# Altium PCB FPv0.12.PcbDoc (part 2 of 2)
Units mm, origin at the board's own origin, x right, y up, seen from the top; angles counter-clockwise.
Board outline 81.28 x 53.34 mm, 4 copper layers (Top Layer, GROUND PLANE, MidLayer1, Bottom Layer); 94 components, 141 nets, 574 pads, 258 vias.
Unrouted connection lines stored in the file: 31.
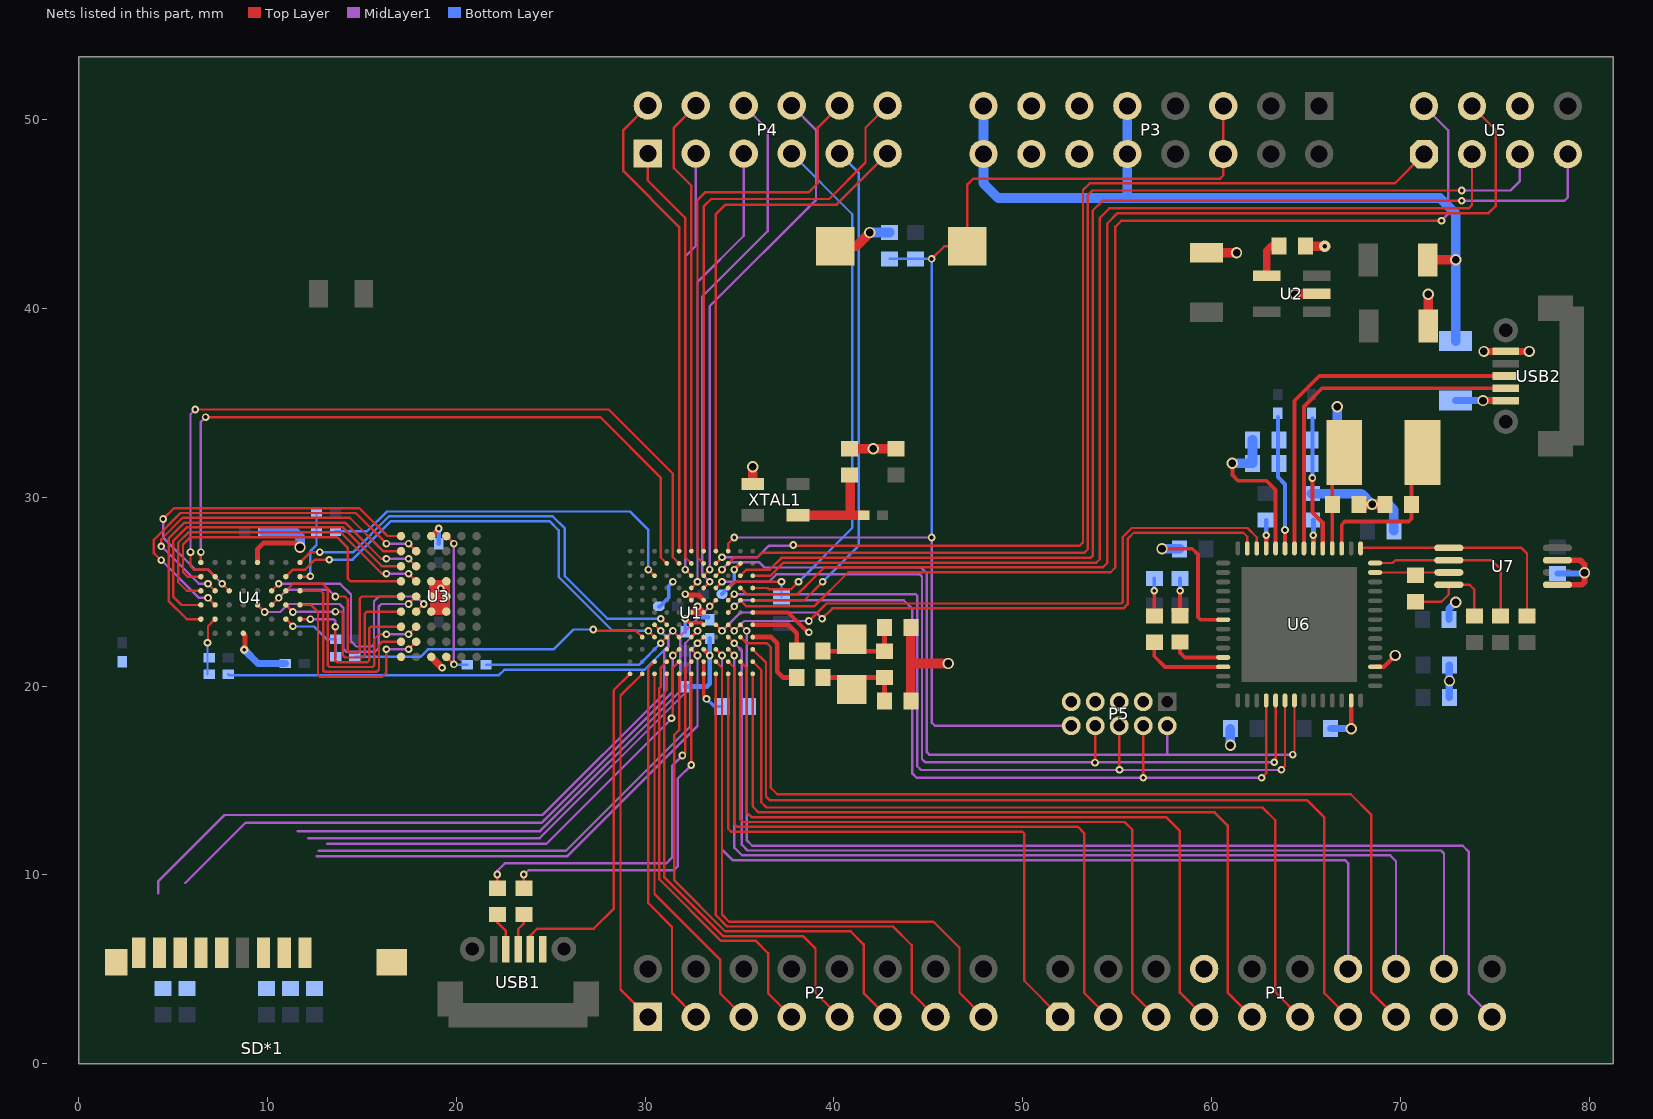
[diagram p4: the nets of this part, all layers, seen from the top]

## Via types
v1: diameter 0.403, hole 0.2, Top Layer to Bottom Layer, tented both sides, 200 vias
v2: diameter 0.6, hole 0.4, Top Layer to Bottom Layer, tented both sides, 29 vias
v3: diameter 0.5, hole 0.2, Top Layer to Bottom Layer, 25 vias
v4: diameter 1, hole 1, Top Layer to Bottom Layer, 2 vias
v5: diameter 0.6, hole 0.24, Top Layer to Bottom Layer, tented both sides, 1 vias
v6: diameter 0.453, hole 0.2, Top Layer to Bottom Layer, tented both sides, 1 vias

## Nets (pads, with @x,y where several pads share a name; then routed paths per layer and width w, separated by ;. In a path a pad name is that pad's centre, name@x,y a point inside that pad or via, vN(x,y) a via of type N, cw(c..) or ccw(c..) an arc to the next point about the centre after c; other vN are vias at no path point) (continued)
AD19: U1.D10 U4.H1 | length 38
  Top Layer w0.127: U4.H1@6.475,26.55 v1(6.475,27.1) ; v1(6.725,34.25) 27.625,34.25 30.825,31.05 30.825,26.825 U1.D10@31.15,26.5
  MidLayer1 w0.127: v1(6.475,27.1) 6.475,34 v1(6.725,34.25) v1@6.85,34.25
AD20: U1.E10 U4.G2 | length 41.5
  Top Layer w0.127: v1@5.925,27.125 v1(5.925,27.1) 5.925,26.35 6.1,26.175 6.85,26.175 U4.G2@7.225,25.8 ; v1(6.175,34.65) 28.075,34.65 31.464,31.261 31.464,27.284 31.466,27.282 31.466,26.834 U1.E10@31.8,26.5
  MidLayer1 w0.127: v1(5.925,27.1) 5.925,34.4 v1(6.175,34.65)
ADC0_DM0: P1.7 U1.K2 | length 41.8
  Top Layer w0.127: U1.K2@35.05,21.3 35.375,20.975 35.375,13.325 35.638,13.062 57.588,13.062 58.325,12.325 58.325,3.769 P1.7@59.609,2.485
ADC0_DM1: P2.15 U1.H2 | length 31
  Top Layer w0.127: U1.H2@33.75,21.3 34.075,20.975 34.075,7.9 34.45,7.525 45.275,7.525 46.65,6.15 46.65,3.76 P2.15@47.925,2.485
ADC0_DP0: P1.5 U1.K1 | length 39.1
  Top Layer w0.127: U1.K1@35.05,20.65 35.05,12.95 35.192,12.808 55.392,12.808 55.8,12.4 55.8,3.754 P1.5@57.069,2.485
ADC0_DP1: P2.13 U1.H1 | length 28.1
  Top Layer w0.127: U1.H1@33.75,20.65 33.75,7.866 34.345,7.271 43.129,7.271 44.125,6.275 44.125,3.745 P2.13@45.385,2.485
ADC0XX: P1.14 U1.H3 | length 49.8
  Top Layer w0.127: U1.H3@33.75,21.95 v1(34.075,21.625)
  MidLayer1 w0.127: v1(34.075,21.625) 34.075,11.35 34.637,10.788 67.062,10.788 67.229,10.621 P1.14@67.229,5.025
ADC1_DM0: P1.11 U1.L2 | length 46.2
  Top Layer w0.127: U1.L2@35.7,21.3 36.15,20.85 36.15,13.85 36.425,13.575 62.7,13.575 63.375,12.9 63.375,3.799 P1.11@64.689,2.485
ADC1_DM1: P1.3 U1.J2 | length 37.7
  Top Layer w0.127: U1.J2@34.4,21.3 34.725,20.975 34.725,12.7 34.871,12.554 52.921,12.554 53.25,12.225 53.25,3.764 P1.3@54.529,2.485
ADC1_DP0: P1.9 U1.L1 | length 43.3
  Top Layer w0.127: U1.L1@35.7,20.65 35.7,13.625 36.009,13.316 60.159,13.316 60.85,12.625 60.85,3.784 P1.9@62.149,2.485
ADC1_DP1: P1.1 U1.J1 | length 34.5
  Top Layer w0.127: U1.J1@34.4,20.65 34.4,12.45 34.55,12.3 49.975,12.3 50.079,12.196 50.079,4.395 P1.1@51.989,2.485
ADC1XX: P1.16 U1.J3 | length 51.7
  Top Layer w0.127: U1.J3@34.4,21.95 v1(34.725,21.625)
  MidLayer1 w0.127: v1(34.725,21.625) 34.725,11.45 35.133,11.042 69.458,11.042 69.769,10.731 P1.16@69.769,5.025
ADDR0: U3.J1
ADDR1: U3.H1 U4.A3 | length 11
  Top Layer w0.127: U4.A3@11.725,25.05 12.825,25.05 12.946,24.929 12.946,20.829 13.017,20.758 15.783,20.758 15.908,20.883 15.908,22.183 16.075,22.35 U3.H1@17.075,22.35
ADDR2: U3.H2 U4.A4 | length 11.2
  Top Layer w0.127: U4.A4@11.725,24.3 12.3,24.3 12.675,23.925 12.675,20.6 12.771,20.504 16.079,20.504 16.3,20.725 v1(16.3,21.95) ; v1(17.475,21.95) U3.H2@17.875,22.35
  MidLayer1 w0.127: v1(16.3,21.95) v1(17.475,21.95)
ADDR3: U3.G1 U4.A5 | length 9.3
  Top Layer w0.127: U4.A5@11.725,23.55 v1(12.275,23.55) ; v1(13.6,23.15) 13.6,21.35 13.684,21.266 15.291,21.266 15.4,21.375 15.4,22.59 15.4,23.075 15.475,23.15 U3.G1@17.075,23.15
  MidLayer1 w0.127: v1(12.275,23.55) 13.5,23.55 13.6,23.45 v1(13.6,23.15)
ADDR4: U3.G2 U4.B3 | length 13
  Top Layer w0.127: U4.B3@10.975,25.05 11.35,25.425 12.925,25.425 13.2,25.15 13.2,21.1 13.288,21.012 15.566,21.012 15.654,21.1 15.654,22.484 15.92,22.75 v1(16.3,22.75) v1@16.292,22.758 ; v1(17.475,22.75) U3.G2@17.875,23.15
  MidLayer1 w0.127: v1(16.3,22.75) v1(17.475,22.75)
ADDR5: U3.F1 U4.B4 | length 11.1
  Top Layer w0.127: U4.B4@10.975,24.3 v1(11.35,23.925) ; v1(13.6,23.95) 13.925,23.95 13.996,23.879 13.996,21.629 14.105,21.52 15.066,21.52 15.146,21.6 15.146,23.184 15.15,23.188 15.15,23.825 15.275,23.95 U3.F1@17.075,23.95
  MidLayer1 w0.127: v1(11.35,23.925) 11.375,23.95 v1@13.775,23.95
ADDR6: U3.F2 U4.C3 | length 14.2
  Top Layer w0.127: U4.C3@10.225,25.05 v1(10.6,25.425) ; U3.F2@17.875,23.95 v1(18.275,24.35)
  MidLayer1 w0.127: v1(10.6,25.425) 13.85,25.425 14.425,24.85 14.425,22.375 14.7,22.1 15.521,22.1 15.646,22.225 15.646,24.496 15.9,24.75 17.875,24.75 v1(18.275,24.35)
ADDR7: U3.E1 U4.C4 | length 13
  Top Layer w0.127: U4.C4@10.225,24.3 v1(10.6,24.675) ; v1(13.6,24.75) 14.1,24.75 14.25,24.6 14.25,21.85 14.326,21.774 14.816,21.774 14.892,21.85 14.892,24.642 15,24.75 U3.E1@17.075,24.75
  MidLayer1 w0.127: v1(10.6,24.675) 11.025,25.1 13.25,25.1 v1(13.6,24.75)
ADDR8: U3.E2 U4.D4 | length 13.6
  Top Layer w0.127: U4.D4@9.475,24.3 v1(9.85,23.925) ; v1(17.475,24.35) U3.E2@17.875,24.75
  MidLayer1 w0.127: v1(9.85,23.925) 10.675,23.925 11.1,24.35 13.825,24.35 14.029,24.146 14.029,23.841 14.025,23.837 14.025,21.975 14.188,21.812 15.687,21.812 15.9,22.025 15.9,24.225 16.025,24.35 v1(17.475,24.35)
ADDR9: U3.D1 U4.H2 | length 16.1
  Top Layer w0.127: U4.H2@6.475,25.8 5.775,25.8 5.529,26.046 5.529,27.499 5.923,27.892 13.683,27.892 14.263,27.313 14.263,25.687 14.4,25.55 U3.D1@17.075,25.55
ADDR10: U3.D2 U4.H3 | length 17.4
  Top Layer w0.127: U4.H3@6.475,25.05 5.725,25.05 5.275,25.5 5.275,27.604 5.818,28.146 13.879,28.146 16.075,25.95 v1(16.3,25.95) ; v1(17.475,25.95) U3.D2@17.875,25.55
  MidLayer1 w0.127: v1(16.3,25.95) v1(17.475,25.95)
ADDR11: U3.C1 U4.H4 | length 17.8
  Top Layer w0.127: U4.H4@6.475,24.3 5.45,24.3 5.021,24.729 5.021,27.709 5.72,28.408 14.006,28.408 16.064,26.35 U3.C1@17.075,26.35
ADDR12: U3.C2 U4.H5 | length 19.8
  Top Layer w0.127: U4.H5@6.475,23.55 5.725,23.55 4.767,24.508 4.767,27.814 5.615,28.662 14.113,28.662 16.025,26.75 v1(16.3,26.75) ; v1(17.475,26.75) U3.C2@17.875,26.35
  MidLayer1 w0.127: v1(16.3,26.75) v1(17.475,26.75)
ADDR13: U3.B1 U4.G3 | length 18.1
  Top Layer w0.127: v1(4.375,27.4) 4.375,27.782 5.509,28.916 14.359,28.916 16.125,27.15 U3.B1@17.075,27.15 ; v1(6.85,25.425) U4.G3@7.225,25.05
  MidLayer1 w0.127: v1@4.409,27.384 6.367,25.425 v1(6.85,25.425)
ADDR14: U3.B2 U4.G4 | length 20.4
  Top Layer w0.127: v1(4.375,26.675) 4.352,26.675 3.983,27.044 3.983,27.749 5.404,29.17 14.68,29.17 v1(16.3,27.55) ; v1(6.85,24.675) U4.G4@7.225,24.3 ; v1(17.475,27.55) U3.B2@17.875,27.15
  MidLayer1 w0.127: v1@4.352,26.675 v1(4.375,26.675) 6.375,24.675 v1(6.85,24.675) ; v1(16.3,27.55) v1(17.475,27.55)
ADDR15: U3.A1 U4.F3 | length 19.1
  Top Layer w0.127: v1(4.475,28.85) 5.049,29.424 14.876,29.424 16.35,27.95 U3.A1@17.075,27.95 ; v1(7.6,25.425) U4.F3@7.975,25.05
  MidLayer1 w0.127: v1(4.475,28.85) 4.475,27.875 6.175,26.175 6.85,26.175 v1(7.6,25.425)
AGND: R10.2 U1.F6 U1.G6 | length 3
  Top Layer w0.254: 32.775,23.9 v1(32.775,24.225) ; v1(32.775,24.225) U1.G6@33.1,23.9 U1.F6@32.45,23.9 v1(32.775,24.225)
  Bottom Layer w0.254: v1(32.775,24.225) 32.775,23.8 32.929,23.646 R10.2@33.347,23.646
ALE: R17.2 U3.A4 U3.J4 | length 8.2
  Top Layer w0.127: U3.J4@19.475,21.55 v1(19.875,21.15) ; U3.A4@19.475,27.95 v1(19.875,27.55)
  MidLayer1 w0.127: v1(19.875,21.15) v1(19.875,27.55)
  Bottom Layer w0.127: v1@19.9,21.125 R17.2@20.575,21.125
AVDD: FB1.2 U1.F5 U1.G5 | length 2.4
  Top Layer w0.203: U1.G5@33.1,23.25 32.995,23.355 32.555,23.355 ; 32.345,23.355 U1.F5@32.45,23.25 32.555,23.355 ; 32.345,23.355 v1(32.125,23.575) 32.345,23.355 ; 32.345,23.355 32.555,23.355
  Bottom Layer w0.203: FB1.2@32.125,22.875 v1(32.125,23.575)
BE23_16: U1.D5 U4.A1 | length 24.3
  Top Layer w0.127: U4.A1@11.725,26.55 12.275,27.1 v1(12.775,27.1) ; v1(30.825,23.575) U1.D5@31.15,23.25
  Bottom Layer w0.127: v1(12.775,27.1) 14.55,27.1 16.446,28.996 25.104,28.996 25.75,28.35 25.75,25.82 27.996,23.575 v1(30.825,23.575)
BE31_24: U1.C4 U4.B2 | length 24.7
  Top Layer w0.127: U4.B2@10.975,25.8 11.35,26.175 12,26.175 12.525,26.7 v1(13.275,26.7) ; v1(30.175,22.925) U1.C4@30.5,22.6
  Bottom Layer w0.127: v1(13.275,26.7) 14.509,26.7 16.551,28.742 24.933,28.742 25.417,28.258 25.417,25.794 28.286,22.925 v1(30.175,22.925)
DAC0: P1.19 U1.K5 | length 59.3
  Top Layer w0.127: U1.K5@35.05,23.25 v1(35.375,22.925)
  MidLayer1 w0.127: v1(35.375,22.925) 35.379,22.921 35.379,11.846 35.675,11.55 73.3,11.55 73.625,11.225 73.625,3.709 P1.19@74.849,2.485
DAC1: P1.15 U1.K4 | length 52.9
  Top Layer w0.127: U1.K4@35.05,22.6 35.368,22.283 36.442,22.283 36.658,22.067 36.658,14.617 37,14.275 67.375,14.275 68.45,13.2 68.45,3.804 P1.15@69.769,2.485
EECLK: R23.2 U6.56 U7.2 | length 9.4
  Top Layer w0.127: U6.56@68.666,26.521 69.591,26.521 69.741,26.671 U7.2@72.566,26.671 74.841,26.671 75.309,26.203 R23.2@75.309,23.717
EECS: R24.2 U6.1 U7.1 | length 12.2
  Top Layer w0.127: U6.1@67.916,27.321 U7.1@72.566,27.321 76.416,27.321 76.706,27.031 R24.2@76.706,23.717
EEDATA: R25.1 U6.55 U7.3 | length 3.9
  Top Layer w0.127: U6.55@68.666,26.021 U7.3@72.566,26.021
FB_ALE: R17.1 U1.D4 | length 10.2
  Top Layer w0.127: v1(30.825,22.275) U1.D4@31.15,22.6
  Bottom Layer w0.127: R17.1@21.575,21.125 29.675,21.125 v1(30.825,22.275)
FB_CS0: U1.D3
FB_CS2: R13.2 U1.B4 | length 16
  Top Layer w0.127: v1(27.25,23) 27.325,22.925 29.525,22.925 U1.B4@29.85,22.6
  Bottom Layer w0.127: R13.2@14.625,21.55 18.1,21.55 18.5,21.95 25.15,21.95 26.2,23 v1(27.25,23)
FB_OE: R11.2 U1.C9 | length 20
  Top Layer w0.127: v1(30.175,26.175) U1.C9@30.5,25.85
  Bottom Layer w0.127: R11.2@13.6,28.2 15.275,28.2 16.325,29.25 29.2,29.25 30.175,28.275 v1(30.175,26.175)
FB_RW: R12.2 U1.C5 | length 25.4
  Top Layer w0.127: U1.C5@30.5,23.25 v1(30.825,22.925)
  Bottom Layer w0.127: R12.2@7.925,20.625 7.967,20.583 22.258,20.583 22.546,20.871 29.975,20.871 31.225,22.121 31.225,22.525 v1(30.825,22.925)
FT_RXD: U1.H5 U6.13 | length 33.4
  Top Layer w0.127: U1.H5@33.75,23.25 v1(34.075,22.925) ; v1(39.375,23.575) 39.921,24.121 55.33,24.121 55.554,24.345 55.554,27.795 55.88,28.121 61.679,28.121 61.891,27.909 U6.13@61.891,27.296
  MidLayer1 w0.127: v1(34.075,22.925) 35.05,23.9 39.05,23.9 v1(39.375,23.575)
FT_TXD: U1.J5 U6.12 | length 33.2
  Top Layer w0.127: U1.J5@34.4,23.25 v1(34.725,22.925) ; v1(38.675,23.45) 39.6,24.375 55.225,24.375 55.3,24.45 55.3,27.9 55.775,28.375 61.9,28.375 62.391,27.884 U6.12@62.391,27.296
  MidLayer1 w0.127: v1(34.725,22.925) 35.25,23.45 v1(38.675,23.45)
GND: C1.1 C2.1 C3.1 C7.1 C8.2 C12.2 C13.1 C14.2 C15.1 C16.1 C17.1 C18.1 C21.2 C22.1 C23.2 C24.1 C25.1 C26.1 C27.1 C28.1 C29.1 C30.1 C31.1 C32.2 C33.1 C34.1 C35.2 C36.1 C37.1 C38.1 P1.8 P1.17 P3.11 P3.12 P3.13 P3.14 P5.3 P5.5 P5.7 P5.9 R10.1 R20.2 R30.1 R31.1 S3.1 SD*1.6 SD*1.10 SD*1.11 SD*1.12 SD*1.13 U1.F7 U1.G3 U1.G7 U1.K10 U1.L6 U2.2 U3.A3 U3.D3 U3.D4 U3.E3 U3.E4 U3.F3 U3.F4 U3.J3 U4.D1 U4.E6 U5.6 U6.10 U6.21 U6.41 U6.45 U7.5 U7.7 USB1.5 USB2.5 XTAL1.2 | length 94.2
  Top Layer w0.203: v1(34.725,26.173) 35.05,26.498 U1.K10@35.05,26.5 ; U1.L6@35.7,23.9 37.575,23.9 38.625,22.85 v1(38.675,22.85) ; v2(57.375,27.275) 58.975,27.275 59.275,26.975 59.275,23.65 59.404,23.521 U6.21@60.616,23.521 ; v2(61.1,31.8) 61.1,31.175 61.4,30.875 62.9,30.875 63.391,30.384 U6.10@63.391,27.296
  Top Layer w0.229: U6.41@67.391,19.246 67.391,17.759 v2(67.4,17.75) ; U6.45@68.666,21.021 69.121,21.021 v2(69.725,21.625)
  Top Layer w0.254: U4.E6@8.725,22.8 8.806,22.719 8.806,22.006 8.775,21.975 v6(8.775,21.925) ; U4.D1@9.475,26.55 9.475,27.275 9.775,27.575 11.5,27.575 v2(11.725,27.35) ; U3.F3@18.675,23.95 U3.F3@18.794,24.069 ; U3.D3@18.675,25.55 18.75,25.475 18.794,25.431 v1@19.075,25.15 ; U3.A3@18.675,27.95 v1(19.075,28.35) ; U3.E3@18.75,24.825 U3.E3@18.675,24.75 18.794,24.631 19.075,24.35 ; U3.D4@19.356,25.431 U3.D4@19.475,25.55 ; v1(32.125,24.875) 32.179,24.821 32.45,24.821 ; U1.F7@32.45,24.55 32.45,24.821 ; U1.G3@33.1,21.95 v1(33.425,21.625) ; U1.G7@33.1,24.55 32.829,24.821 32.45,24.821
  Top Layer w0.305: U7.5@78.316,25.371 79.621,25.371 79.75,25.5 v2(79.75,26) 79.75,26.45 79.529,26.671 U7.7@78.316,26.671
  Top Layer w0.381: U3.J3@18.675,21.55 v1(19.25,20.975) ; U3.F3@18.675,23.95 U3.F4@19.475,23.95 ; U3.D3@18.75,25.475 U3.E3@18.75,24.825 ; U3.E3@18.794,24.631 18.794,24.069 19.075,24.35 ; U3.D3@18.794,25.431 19.356,25.431 v1@19.075,25.15 ; U3.D4@19.475,25.55 U3.E4@19.475,24.75 ; v2(74.425,37.725) USB2.5@75.575,37.725 v2(76.825,37.725) ; U3.E3@18.75,24.825 v1@19.075,25.15 ; U3.E3@18.75,24.825 18.825,24.75 U3.E4@19.475,24.75 ; 19.075,24.35 U3.E4@19.475,24.75 ; 19.075,24.35 U3.F4@19.475,23.95 ; v1@19.075,25.15 U3.E4@19.475,24.75 ; U3.F4@19.475,23.95 U3.E4@19.475,24.75
  Top Layer w0.508: XTAL1.2@35.7,30.7 v2(35.7,31.625) ; S3.1@40.071,43.292 41.167,43.292 v2(41.9,44.025) ; C36.1@40.825,32.575 C27.1@43.275,32.575 ; C38.1@44.075,19.225 C37.1@44.075,23.1 ; 44.112,21.2 v2(46.05,21.2) ; C12.2@59.725,42.95 v2(61.325,42.95) ; v2(64.4,40.75) 64.425,40.775 U2.2@65.579,40.775 ; C13.1@64.975,43.3 v5(66,43.3) ; C35.2@67.799,29.621 C33.1@69.193,29.621 ; C8.2@71.475,39.075 v2(71.475,40.75)
  Bottom Layer w0.203: C2.1@30.725,24.225 30.783,24.225 31.255,24.697 31.255,25.305 v1(31.475,25.525) ; C14.2@34.075,24.875 34.725,25.525 v1(34.725,26.173)
  Bottom Layer w0.254: C18.1@19.075,24.4 19.075,25.15 19.1,25.175 v1(19.175,25.175) ; C15.1@19.075,27.55 v1(19.075,28.35) ; C1.1@32.125,19.975 33.275,19.975 33.425,20.125 v1(33.425,21.625) ; v1(33.425,21.625) R10.1@33.425,22.525
  Bottom Layer w0.305: C34.1@78.316,25.971 79.721,25.971 v2(79.75,26)
  Bottom Layer w0.381: v6(8.775,21.925) 9.5,21.2 C16.1@10.95,21.2 ; C28.1@66.3,17.75 v2(67.4,17.75) ; C30.1@72.58,23.525 72.58,24.105 v2(72.925,24.45) ; C32.2@72.591,19.396 C29.1@72.591,21.121
  Bottom Layer w0.508: C3.1@9.8,28.175 11.45,28.175 11.725,27.9 v2(11.725,27.35) ; v2(41.9,44.025) C7.1@42.95,44.025 ; v2(57.375,27.275) C31.1@58.3,27.275 ; v2(61,16.875) C25.1@61,17.75 ; v2(61.1,31.8) 62.162,31.8 C22.1@62.166,31.796 C21.2@62.166,33.046 ; R20.2@65.291,30.196 67.929,30.196 v2(68.5,29.625) 69.375,29.625 69.659,29.341 C26.1@69.659,28.224 ; v2(66.65,34.8) 66.666,34.784 C24.1@66.666,31.796
  other v2: 72.6,20.275 42.075,32.575
JTAG_TCK: P5.4 U1.J6 U6.32 | length 44.5
  Top Layer w0.127: U1.J6@34.4,23.9 v1(34.725,24.225) ; v1(56.38,15.155) P5.4@56.38,17.905 ; v1(62.65,15.15) 62.891,15.391 U6.32@62.891,19.246
  MidLayer1 w0.127: v1(34.725,24.225) 35.05,24.55 43.7,24.55 44.159,24.091 44.159,15.366 44.375,15.15 v1(62.65,15.15)
JTAG_TDI: P5.8 U1.H8 U6.33 | length 44.8
  Top Layer w0.127: U1.H8@33.75,25.2 v1(34.075,25.525) ; v1(53.825,15.95) 53.84,15.965 P5.8@53.84,17.905 ; v1@63.225,15.975 v1@63.275,15.975 ; v1@63.391,16.091 U6.33@63.391,19.246
  MidLayer1 w0.127: v1(34.075,25.525) 36.55,25.525 36.944,25.919 44.556,25.919 44.667,25.808 44.667,16.133 44.825,15.975 v1(63.325,15.975)
JTAG_TDO: P5.6 U1.J7 U6.34 | length 45.1
  Top Layer w0.127: U1.J7@34.4,24.55 v1(34.725,24.875) ; v1@55.11,15.59 P5.6@55.11,17.905 ; v1@63.7,15.581 63.891,15.772 U6.34@63.891,19.246
  MidLayer1 w0.127: v1(34.725,24.875) 44.325,24.875 44.413,24.787 44.413,15.762 44.617,15.558 63.7,15.558 63.7,15.719 63.844,15.575 v1(63.7,15.575)
  other v1: 55.125,15.575
JTAG_TMS: P5.2 U1.H9 U6.35 | length 45.1
  Top Layer w0.127: U1.H9@33.752,25.85 v1(34.075,26.173) ; v1(64.3,16.375) 64.391,16.466 U6.35@64.391,19.246
  MidLayer1 w0.127: v1(34.075,26.173) 34.473,26.571 36.029,26.571 36.317,26.283 44.617,26.283 44.921,25.979 44.921,16.504 45.05,16.375 57.65,16.375 ; P5.2@57.65,17.905 57.65,16.375 ; v1(64.3,16.375) 57.65,16.375
MRF_CS: U1.K9 U5.7 | length 65.3
  Top Layer w0.127: U1.K9@35.05,25.85 35.375,26.175 36.6,26.175 37.221,26.796 53.596,26.796 53.7,26.9 53.7,45.175 54.225,45.7 v1@73.253,45.7
  MidLayer1 w0.127: v1@73.253,45.7 78.675,45.7 78.87,45.895 U5.7@78.87,48.375
  other v1: 73.251,45.702
MRF_INT: U1.K7 U5.2 | length 63
  Top Layer w0.127: U1.K7@35.05,24.55 35.375,24.225 38.95,24.225 40.759,26.034 54.659,26.034 54.9,26.275 54.9,44.325 55.225,44.65 v1(72.175,44.65)
  MidLayer1 w0.127: U5.2@71.25,50.715 72.525,49.44 72.525,45 v1(72.175,44.65)
MRF_SCK: U1.L9 U5.3 | length 59.7
  Top Layer w0.127: U1.L9@35.7,25.85 36.634,25.85 37.326,26.542 53.892,26.542 54.075,26.725 54.075,44.8 54.579,45.304 73.604,45.304 73.79,45.49 U5.3@73.79,48.375
MRF_SDI: U1.H10 U5.1 | length 57.4
  Top Layer w0.127: U1.H10@33.75,26.5 v1(34.075,26.825) ; v1@37.85,27.445 53.02,27.445 53.192,27.617 53.192,46.267 53.55,46.625 69.7,46.625 U5.1@71.25,48.175
  MidLayer1 w0.127: v1(34.075,26.825) 35.95,26.825 36.57,27.445 v1@37.82,27.445
  other v1: 37.85,27.475
MRF_SDO: U1.J10 U5.5 | length 62.9
  Top Layer w0.127: U1.J10@34.4,26.5 34.716,26.816 35.94,26.816 36.2,27.075 53.275,27.075 53.446,27.246 53.446,46.005 53.691,46.25 v1(73.25,46.25)
  MidLayer1 w0.127: v1(73.25,46.25) 75.825,46.25 76.33,46.755 U5.5@76.33,48.375
MRF_WAKE: U1.K8 U5.4 | length 65
  Top Layer w0.127: U1.K8@35.05,25.2 35.375,24.875 38.079,24.875 38.517,25.313 38.517,25.317 39.488,26.288 54.238,26.288 54.475,26.525 54.475,44.5 55.025,45.05 74.675,45.05 75.05,45.425 75.05,49.455 U5.4@73.79,50.715
N_RST: C7.2 P3.5 P3.6 P5.10 R32.2 S3.2 U1.J11 | length 68.5
  Top Layer w0.127: U1.J11@34.4,27.15 34.4,27.55 v1(34.725,27.875) ; v1(45.175,42.625) 45.842,43.292 S3.2@47.071,43.292 47.071,46.571 47.379,46.879 60.454,46.879 60.62,47.045 P3.5@60.62,50.725
  MidLayer1 w0.127: v1(34.725,27.875) v1(45.175,27.875) 45.175,18.075 45.35,17.9 52.15,17.9 P5.10@52.57,17.48
  Bottom Layer w0.127: C7.2@42.95,42.625 v1(45.175,42.625) ; v1(45.175,27.875) v1@45.175,42.525
NetC13_2: C13.2 U2.4 | length 2.1
  Top Layer w0.381: U2.4@62.921,41.725 62.921,43.071 63.15,43.3 C13.2@63.575,43.3
NetC21_1: C21.1 C22.2 IND2.2 U6.9 | length 7.1
  Top Layer w0.229: U6.9@63.891,27.296 v1(63.891,28.271)
  Bottom Layer w0.229: IND2.2@63.516,34.246 63.516,31.071 63.891,30.696 v1(63.891,28.271)
NetC23_1: C23.1 C24.2 IND3.2 U6.5 | length 7.1
  Top Layer w0.229: v1(65.341,31.021) 65.341,29.196 65.891,28.646 U6.5@65.891,27.296
  Bottom Layer w0.229: v1(65.341,31.021) IND3.2@65.341,34.171
NetC33_2: C33.2 U6.3 Y2.2 | length 8.3
  Top Layer w0.203: U6.3@66.891,27.296 66.891,28.546 67.066,28.721 70.441,28.721 70.593,28.873 C33.2@70.593,29.621 Y2.2@70.593,32.056
NetC35_1: C35.1 U6.4 Y2.1 | length 4.7
  Top Layer w0.203: U6.4@66.391,27.296 Y2.1@66.391,32.004
NetC36_2: C36.2 FB2.2 XTAL1.4 | length 5.5
  Top Layer w0.508: XTAL1.4@38.1,29.049 40.875,29.05 ; C36.2@40.875,31.125 40.875,29.05 ; FB2.2@41.575,29.05 40.875,29.05
NetC37_2: C37.2 R26.1 R27.1 Y1.1 | length 4.3
  Top Layer w0.254: R26.1@39.429,21.852 R27.1@42.474,21.852 ; R27.1@42.675,21.85 C37.2@42.675,23.1
NetC38_2: C38.2 R27.2 R28.1 Y1.2 | length 4.3
  Top Layer w0.254: R28.1@39.429,20.455 R27.2@42.477,20.455 ; C38.2@42.675,19.225 R27.2@42.675,20.45
NetL3_2: L3.2 R31.2
NetL4_1: L4.1 R18.1 | length 2
  Top Layer w0.203: L4.1@58.334,23.729 v1(58.334,25.054)
  Bottom Layer w0.203: v1(58.334,25.054) R18.1@58.334,25.707
NetL5_1: L5.1 R19.1 | length 2
  Top Layer w0.203: v1@56.934,25.054 56.965,25.023 L5.1@56.965,23.725
  Bottom Layer w0.203: v1@56.934,25.054 v1(56.963,25.055) v1(56.963,25.055) ; v1@56.965,25.058 R19.1@56.965,25.703
NetLS1_1: LS1.1 LS1.1A
NetLS1_2: LS1.2 LS1.2A
NetR2_2: R2.2 USB1.2 | length 2
  Top Layer w0.127: R2.2@22.175,7.9 22.175,7.475 22.625,7.025 USB1.2@22.625,6.075
NetR3_2: R3.2 USB1.3 | length 1.9
  Top Layer w0.127: USB1.3@23.275,6.075 23.275,7.125 23.575,7.425 R3.2@23.575,7.9
NetR9_2: R9.2 U1.J8 | length 3.8
  Top Layer w0.127: U1.J8@34.4,25.2 34.725,25.525 v1(37.225,25.525)
  Bottom Layer w0.127: R9.2@37.225,24.725 v1(37.225,25.525)
NetR11_1: R11.1 R16.1 U4.A2 | length 4
  Top Layer w0.127: U4.A2@11.725,25.8 v1@12.25,25.8
  Bottom Layer w0.127: v1(12.275,25.825) 12.275,27.154 12.6,27.479 R11.1@12.6,28.2 R16.1@12.6,29.125
NetR12_1: R12.1 R15.1 U4.G5 | length 3.1
  Top Layer w0.127: v1@6.85,22.3 6.85,23.175 U4.G5@7.225,23.55
  Bottom Layer w0.127: R12.1@6.825,20.625 v1(6.825,22.3)
NetR13_1: R13.1 R14.1 U4.B5 | length 4
  Top Layer w0.127: U4.B5@10.975,23.55 v1(11.35,23.175)
  Bottom Layer w0.127: v1(11.35,23.175) 11.367,23.158 12.467,23.158 13.15,22.475 R14.1@13.625,22.475 R13.1@13.625,21.55
NetR20_1: R20.1 U6.6 | length 1.5
  Top Layer w0.254: U6.6@65.391,27.296 v1(65.391,27.996)
  Bottom Layer w0.254: v1@65.391,28.046 R20.1@65.391,28.796
NetR21_1: R21.1 U6.11 | length 1.5
  Top Layer w0.229: U6.11@62.891,27.296 v1(62.891,27.996)
  Bottom Layer w0.229: v1(62.891,27.996) R21.1@62.891,28.796
NetR22_2: R22.2 R25.2 U7.4 | length 5.3
  Top Layer w0.127: R25.2@70.791,24.471 72.171,24.471 72.566,24.866 U7.4@72.566,25.371 73.666,25.371 73.912,25.125 R22.2@73.912,23.717
NetR30_2: R30.2 U1.G1 U1.G2 | length 3.3
  Top Layer w0.178: U1.G2@33.1,21.3 U1.G1@33.1,20.65 33.1,19.475 v1(33.25,19.325)
  Bottom Layer w0.127: R30.2@34.075,18.925 R30.2@34.075,19.15
  Bottom Layer w0.178: v1(33.25,19.325) 33.65,18.925 R30.2@34.075,18.925
PTA11: P1.18 U1.J4 | length 54.8
  Top Layer w0.127: U1.J4@34.4,22.6 v1(34.725,22.275)
  MidLayer1 w0.127: v1(34.725,22.275) 35.125,21.875 35.125,11.6 35.429,11.296 72.154,11.296 72.309,11.141 P1.18@72.309,5.025
PTA13: P4.9 U1.L7 | length 28
  Top Layer w0.127: U1.L7@35.7,24.55 38.425,24.55 v1(39.4,25.525)
  Bottom Layer w0.127: v1(39.4,25.525) 41.325,27.45 41.325,47.185 P4.9@40.305,48.205
PTA15: P4.7 U1.L8 | length 27.8
  Top Layer w0.127: U1.L8@35.7,25.2 36.475,25.2 36.542,25.133 37.733,25.133 v1(38.125,25.525)
  Bottom Layer w0.127: P4.7@37.765,48.205 40.975,44.995 40.975,28.375 v1(38.125,25.525)
PTA29: P4.11 U1.H11 | length 28.3
  Top Layer w0.127: U1.H11@33.75,27.15 33.75,45 34.25,45.5 40.14,45.5 P4.11@42.845,48.205
PTB0: P4.12 U1.G11 | length 31.3
  Top Layer w0.127: U1.G11@33.1,27.15 33.1,45.4 33.5,45.8 39.75,45.8 41.675,47.725 41.675,49.575 P4.12@42.845,50.745
PTB1: P4.10 U1.G10 | length 30.7
  Top Layer w0.127: U1.G10@33.1,26.5 32.775,26.825 32.775,45.75 33.175,46.15 38.65,46.15 39.15,46.65 39.15,49.59 P4.10@40.305,50.745
PTB2: P4.8 U1.G9 | length 27.9
  Top Layer w0.127: U1.G9@33.1,25.85 v1(33.425,26.175)
  MidLayer1 w0.127: v1(33.425,26.175) 33.425,40.125 39.05,45.75 39.05,49.46 P4.8@37.765,50.745
PTB3: P4.6 U1.G8 | length 27.8
  Top Layer w0.127: U1.G8@33.1,25.2 v1(33.425,25.525)
  MidLayer1 w0.127: v1(33.425,25.525) 33.029,25.921 33.029,40.629 36.5,44.1 36.5,49.47 P4.6@35.225,50.745
PTB6: P4.4 U1.F11 | length 24.5
  Top Layer w0.127: U1.F11@32.45,27.15 32.45,46.5 31.525,47.425 31.525,49.585 P4.4@32.685,50.745
PTB7: P4.2 U1.E11 | length 25.4
  Top Layer w0.127: P4.2@30.145,50.745 28.85,49.45 28.85,47.275 31.8,44.325 U1.E11@31.8,27.15
PTB20: P4.1 U1.F10 | length 22.7
  Top Layer w0.127: P4.1@30.145,48.205 30.145,46.78 32.125,44.8 32.125,26.825 U1.F10@32.45,26.5
PTB21: P4.3 U1.F9 | length 22.7
  Top Layer w0.127: v1(32.125,26.175) U1.F9@32.45,25.85
  MidLayer1 w0.127: v1(32.125,26.175) 32.125,42.75 32.685,43.31 P4.3@32.685,48.205
PTB22: P4.5 U1.F8 | length 24.2
  Top Layer w0.127: U1.F8@32.45,25.2 v1(32.775,25.525)
  MidLayer1 w0.127: v1(32.775,25.525) 32.775,41.4 35.225,43.85 P4.5@35.225,48.205
PTD10: P2.1 U1.B1 | length 19.2
  Top Layer w0.127: U1.B1@29.85,20.65 28.7,19.5 28.7,3.93 P2.1@30.145,2.485
PTD11: P2.3 U1.C2 | length 20
  Top Layer w0.127: U1.C2@30.5,21.3 30.175,20.975 30.175,8.5 31.425,7.25 31.425,3.745 P2.3@32.685,2.485
PTD12: P2.5 U1.C1 | length 20.1
  Top Layer w0.127: U1.C1@30.5,20.65 30.5,9 33.975,5.525 33.975,3.735 P2.5@35.225,2.485
PTD13: P2.7 U1.D2 | length 23
  Top Layer w0.127: U1.D2@31.15,21.3 30.835,20.984 30.835,19.96 30.754,19.879 30.754,9.784 34.029,6.509 35.866,6.509 36.525,5.85 36.525,3.725 P2.7@37.765,2.485
PTD14: P2.9 U1.D1 | length 24.6
  Top Layer w0.127: U1.D1@31.15,20.65 31.15,19.8 31.008,19.658 31.008,9.889 34.134,6.763 38.362,6.763 39.025,6.1 39.025,3.765 P2.9@40.305,2.485
PTD15: P2.11 U1.E1 | length 26.8
  Top Layer w0.127: U1.E1@31.8,20.65 31.8,17.675 31.55,17.425 31.55,9.707 34.24,7.017 40.883,7.017 41.575,6.325 41.575,3.755 P2.11@42.845,2.485
PTE0: R8.2 SD*1.8 U1.E4 | length 35.5
  Top Layer w0.127: v1(31.475,22.925) U1.E4@31.8,22.6
  MidLayer1 w0.127: 4.225,9.025 4.225,9.675 7.725,13.175 24.572,13.175 31.025,19.628 31.025,21.875 31.217,22.067 31.217,22.667 v1(31.475,22.925)
PTE1: R7.2 SD*1.7 U1.E3 | length 32.4
  Top Layer w0.127: v1(31.475,21.625) U1.E3@31.8,21.95
  MidLayer1 w0.127: 5.65,9.575 8.85,12.775 24.532,12.775 31.475,19.718 v1(31.475,21.625)
PTE2: SD*1.5 U1.E2 | length 24.2
  Top Layer w0.127: v1(31.4,18.3) 31.475,18.375 31.475,20.975 U1.E2@31.8,21.3
  MidLayer1 w0.127: 13.175,11.65 24.775,11.65 v1@31.45,18.325
PTE3: R6.2 SD*1.3 U1.F4 | length 27.2
  Top Layer w0.127: U1.F4@32.45,22.6 v1(32.775,22.925)
  MidLayer1 w0.127: 12.15,11.95 24.425,11.95 32.125,19.65 32.125,22.275 v1(32.775,22.925)
PTE4: R5.2 SD*1.2 U1.H7 | length 28.9
  Top Layer w0.127: v1(33.425,24.225) U1.H7@33.75,24.55
  MidLayer1 w0.127: 11.6,12.325 24.441,12.325 31.871,19.755 31.871,22.671 v1(33.425,24.225)
PTE5: R4.2 SD*1.1 U1.G4 | length 27.4
  Top Layer w0.127: v1(32.775,22.275) U1.G4@33.1,22.6
  MidLayer1 w0.127: 12.725,11.275 25.8,11.275 32.379,17.854 32.379,21.879 v1(32.775,22.275)
PTE6: SD*1.9 U1.F3 | length 27.2
  Top Layer w0.127: U1.F3@32.45,21.95 v1(32.775,21.625)
  MidLayer1 w0.127: 12.62,11 25.884,11 32.775,17.891 v1(32.775,21.625)
RTCX1: R26.2 U1.L5 | length 3.5
  Top Layer w0.254: U1.L5@35.7,23.25 37.575,23.25 38.029,22.796 R26.2@38.029,21.852
RTCX2: R28.2 U1.L4 | length 4.1
  Top Layer w0.254: U1.L4@35.7,22.6 36.675,22.6 37,22.275 37,20.775 37.32,20.455 R28.2@38.029,20.455
RXD_LED: L4.2 U6.25 | length 3.1
  Top Layer w0.127: U6.25@60.544,21.593 U6.25@60.616,21.521
  Top Layer w0.203: L4.2@58.325,22.329 58.325,21.775 58.579,21.521 U6.25@60.616,21.521
TXD_LED: L5.2 U6.26 | length 4.6
  Top Layer w0.203: L5.2@56.965,22.325 56.965,21.585 57.529,21.021 U6.26@60.616,21.021
USB0D_N: U6.7 USB2.2 | length 18.6
  Top Layer w0.203: U6.7@64.891,27.296 64.891,34.816 65.85,35.775 USB2.2@75.575,35.775
USB0D_P: U6.8 USB2.3 | length 19.5
  Top Layer w0.203: U6.8@64.391,27.296 64.391,35.116 65.7,36.425 USB2.3@75.575,36.425
USB1_ID: U1.A1 USB1.4 | length 18.5
  Top Layer w0.127: USB1.4@23.9,6.075 23.9,6.775 24.275,7.15 27.275,7.15 28.33,8.205 28.33,19.78 U1.A1@29.2,20.65
USB1D_N: R2.1 U1.F2 | length 21.3
  Top Layer w0.127: R2.1@22.175,9.3 v1(22.175,10.025) ; v1(31.975,16.325) 32.125,16.475 32.125,20.975 U1.F2@32.45,21.3
  MidLayer1 w0.127: v1(22.175,10.025) 22.175,10.225 22.575,10.625 31.125,10.625 31.425,10.925 31.425,15.775 v1(31.975,16.325)
USB1D_P: R3.1 U1.F1 | length 19.5
  Top Layer w0.127: R3.1@23.575,9.3 v1(23.575,10.025) ; v1(32.45,15.825) U1.F1@32.45,20.65
  MidLayer1 w0.127: v1@23.587,10.012 23.825,10.25 31.525,10.25 31.725,10.45 31.725,15.1 v1(32.45,15.825)
VBUS0: D1.1 USB2.1 | length 2.7
  Top Layer w0.381: v2(74.375,35.125) USB2.1@75.575,35.125
  Bottom Layer w0.381: D1.1@72.925,35.125 v2(74.375,35.125) v2@74.35,35.15
VCC: D1.2 F1.1 P3.9 P3.10 P3.15 P3.16 | length 42.9
  Top Layer w0.508: F1.1@71.45,42.575 v2(72.925,42.575)
  Bottom Layer w0.508: P3.15@47.92,50.725 P3.16@47.92,48.185 47.92,46.63 48.7,45.85 55.54,45.85 ; P3.9@55.54,50.725 P3.10@55.54,48.185 55.54,45.85 ; D1.2@72.925,38.275 72.925,45.025 72.1,45.85 55.54,45.85
VREF: P1.13 U1.L3 | length 49.2
  Top Layer w0.127: U1.L3@35.7,21.95 36.404,21.246 36.404,14.162 36.616,13.95 65.075,13.95 65.975,13.05 65.975,3.739 P1.13@67.229,2.485
pads on no net: L1.1 L1.2 L2.1 L2.2 P1.2 P1.4 P1.6 P1.10 P1.12 P1.20 P2.2 P2.4 P2.6 P2.8 P2.10 P2.12 P2.14 P2.16 P3.1 P3.2 S1.1 S1.2 S1.3 S1.4 S2.1 S2.2 S2.3 S2.4 S4.1 S4.2 U1.A4 U1.A5 U1.A6 U1.A9 U1.A10 U1.A11 U1.B5 U1.B6 U1.B8 U1.B11 U1.C11 U1.D11 U1.E8 U1.H4 U1.H6 U1.J9 U1.K3 U1.K11 U3.A2 U3.A5 U3.B3 U3.B4 U3.H3 U3.H4 U3.J2 U3.J5 U4.E3 U4.H6 U6.14 U6.15 U6.17 U6.18 U6.19 U6.20 U6.22 U6.23 U6.24 U6.27 U6.28 U6.29 U6.30 U6.37 U6.38 U6.39 U6.40 U6.42 U6.46 U6.47 U6.48 U6.49 U6.51 U6.52 U6.53 U6.54 U6.57 USB1.0 USB1.1 USB1.6 USB1.7 USB1.8 USB2.0 USB2.4 USB2.6 USB2.7 USB2.8 XTAL1.1
copper on no net:
  other v3: 62.441,21.071 63.541,21.071 64.641,21.071 65.741,21.071 66.841,21.071 62.441,22.171 63.541,22.171 64.641,22.171 65.741,22.171 66.841,22.171 62.441,23.271 63.541,23.271 64.641,23.271 65.741,23.271 66.841,23.271 62.441,24.371 63.541,24.371 64.641,24.371 65.741,24.371 66.841,24.371 62.441,25.471 63.541,25.471 64.641,25.471 65.741,25.471 66.841,25.471
  other v4: 4.785,-4.618 12.785,-4.618

## Polygon pours and split planes (outlines as drawn)
GND on GROUND PLANE (split plane): 80.77,0.51 0.51,0.51 0.51,52.83 80.77,52.83

## Keep-outs
Keep-Out Layer:
  the board outline again, w0.254